# EAGLE board Reciever Circuit v3 (EAGLE 9.6.2)
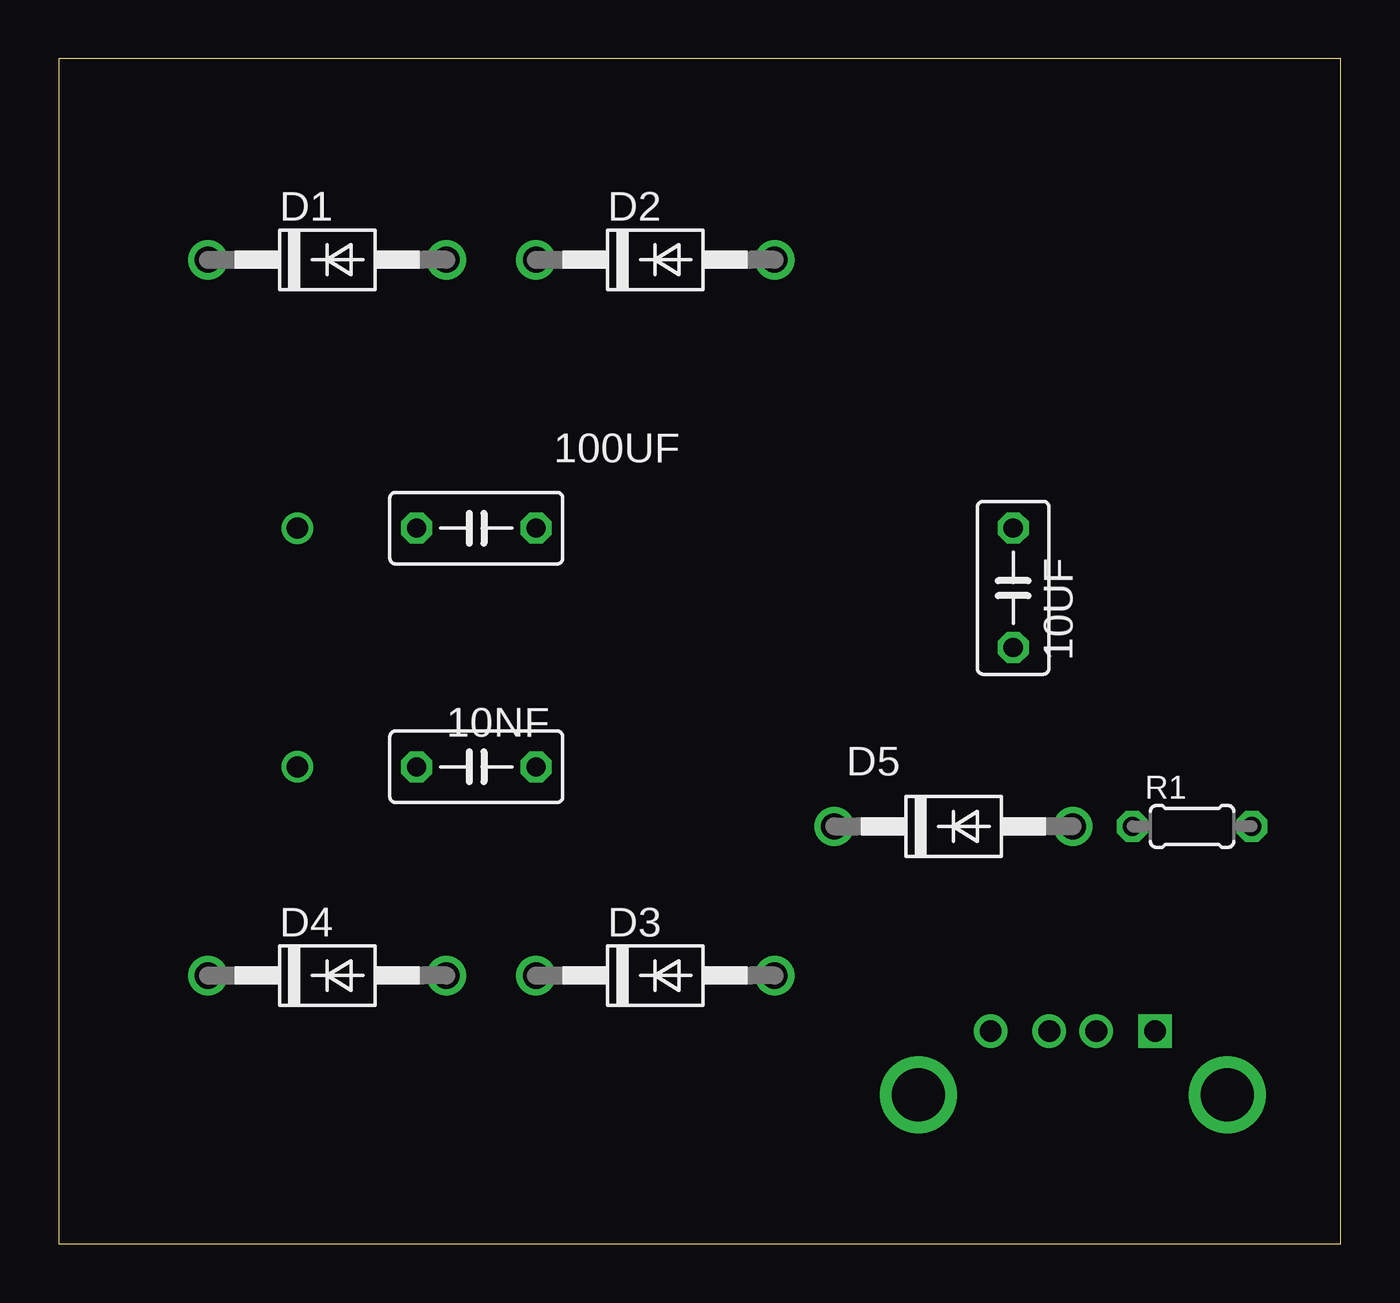
[diagram p0: board, top side]
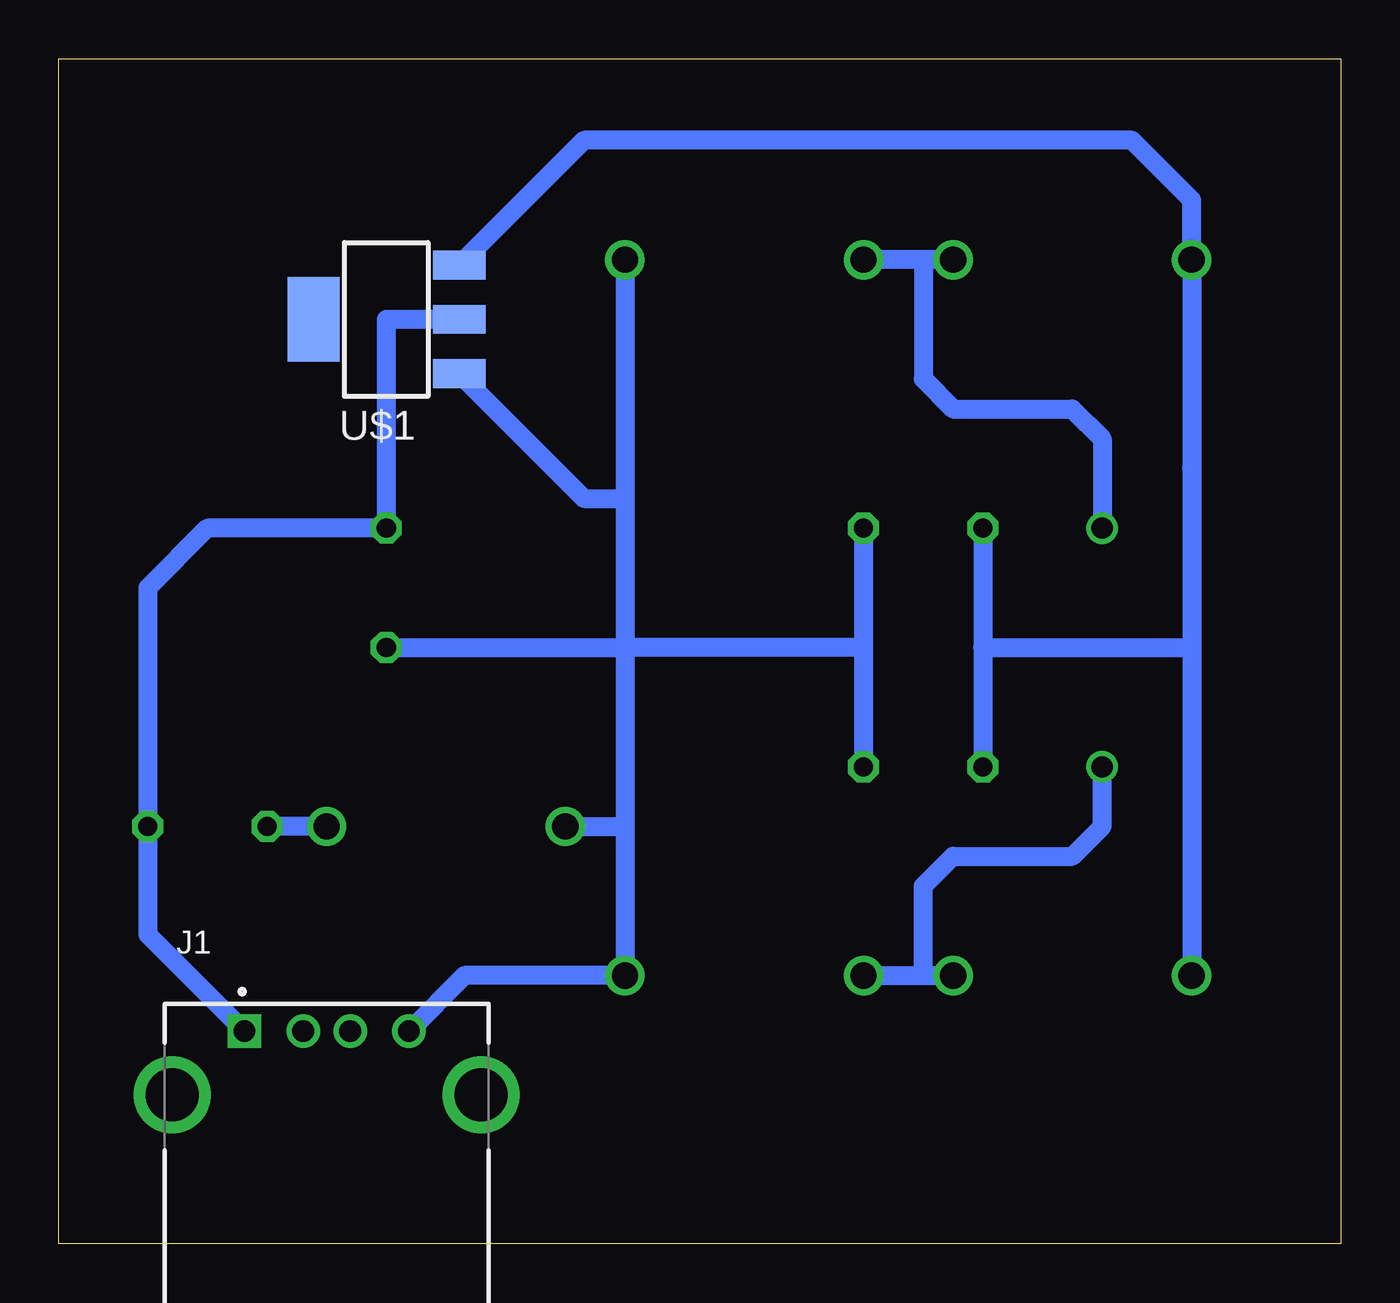
[diagram p1: board, bottom side, seen from below]

Size 54.59 x 50.47 mm. Coordinates in mm from the lower left corner, seen from the top.
Outline: 0,0 54.59,0 54.59,50.47 0,50.47 0,0
Copper layers (1*16): Top 0.035mm / dielectric 1.5mm / Bottom 0.035mm
Design rules "default": minimum track width 6mil, minimum drill 0.35mm, track to track 6mil, track to pad 6mil, pad to pad 6mil, via to via 6mil, smd to smd 6mil, copper to edge 40mil, drill to drill 6mil, minimum pad ring 10mil, minimum via ring 8mil, stop-mask expansion 4mil, vias tented up to drill 0mil, thermal gap 10mil

## Footprints (pad centres in the part's own frame; a part is rotated, then mirrored left to right if it is on the bottom)
C050-030X075 = drill 0.813 octagon: 1 -2.54,0; 2 2.54,0
DO41-10 = drill 1.118: A 5.08,0; C -5.08,0
GCT_USB1130-15-A_REVA = drill 0.92 square: 1 -3.5,2.71 | drill 0.92: 2 -1,2.71; 3 1,2.71; 4 3.5,2.71 | drill 2.26: S1 -6.57,0; S2 6.57,0
0204/5 = drill 0.813 octagon: 1 -2.54,0; 2 2.54,0
SOT223 = smd 1.219 x 2.235: 1 -2.311,-3.099; 2 0,-3.099; 3 2.311,-3.099 | smd 3.6 x 2.2: TAB 0,3.099

## Placement (x,y rotation side)
10NF  [C050-030X075]  17.78,20.32 0 top
10UF  [C050-030X075]  40.64,27.94 270 top
100UF  [C050-030X075]  17.78,30.48 0 top
D1  UF4003  [DO41-10]  11.43,41.91 0 top
D2  UF4003  [DO41-10]  25.4,41.91 0 top
D3  UF4003  [DO41-10]  25.4,11.43 0 top
D4  UF4003  [DO41-10]  11.43,11.43 0 top
D5  UF4003  [DO41-10]  38.1,17.78 0 top
J1  USB1130-15-A_REVA  [GCT_USB1130-15-A_REVA]  43.18,6.35 0 bottom
R1  [0204/5]  48.26,17.78 0 top
U$1  LD1117AS33  [SOT223]  40.64,39.37 90 bottom

## Library data of the parts
10NF 10UF 100UF = rcl; SPICEPREFIX: C
D1-D5 = diode
J1 = USB1130-15-A_REVA; AVAILABILITY: In Stock; DESCRIPTION: USB 2.0 Connector Full size Horizontal Plug, type A, 4 Pins, Through hole, Top mount, 6.99mm profile, High mating cycle, charging receptacle; MF: Global Connector Technology; MP: USB1130-15-A; PACKAGE: None; PRICE: None; PURCHASE-URL: https://pricing.snapeda.com/search/part/USB1130-15-A/?ref=eda
R1 = rcl; SPICEPREFIX: R
U$1 = LD1117AS33; AVAILABILITY: In Stock; DESCRIPTION: Linear Voltage Regulator IC Positive Fixed 1 Output 1A SOT-223; MF: STMicroelectronics; MP: LD1117AS33; PACKAGE: SOT-223 STMicroelectronics; PRICE: None; PURCHASE-URL: https://pricing.snapeda.com/search/part/LD1117AS33/?ref=eda

## Nets
COIL_TERMINATION1: D1.A D2.C
COIL_TERMINATION2: D3.C D4.A
GND: 10NF.2 10UF.2 100UF.2 D2.A D3.A D5.C J1.4 U$1.1
N$1: D5.A R1.1
N$4: 10NF.1 100UF.1 D1.C D4.C U$1.3
N$5: 10UF.1 J1.1 R1.2 U$1.2

## Tracks (layer width: path | path; a pad name or v marks a point on that pad's centre or on a via)
COIL_TERMINATION1  (via drill 0.9)
  Bottom 0.813: D1.A 17.78,41.91 | 17.78,41.91 D2.C | 17.78,41.91 17.78,36.83 16.51,35.56 11.43,35.56 10.16,34.29 v10.16,30.48
COIL_TERMINATION2  (via drill 0.9)
  Bottom 0.813: D3.C 17.78,11.43 | 17.78,11.43 D4.A | 17.78,11.43 17.78,15.24 16.51,16.51 11.43,16.51 10.16,17.78 v10.16,20.32
GND
  Bottom 0.813: D2.A 30.48,31.75 | 30.48,31.75 30.48,25.4 | 30.48,25.4 30.48,17.78 | 30.48,17.78 D3.A 37.31,11.43 J1.4 | 100UF.2 20.32,25.4 | 20.32,25.4 10NF.2 | 20.32,25.4 30.48,25.4 | 10UF.2 30.48,25.4 | U$1.1 32.23,31.75 30.48,31.75 | D5.C 30.48,17.78
N$1
  Bottom 0.813: D5.A R1.1
N$4
  Bottom 0.813: 6.35,25.4 6.35,33.02 D1.C 6.35,44.45 8.89,46.99 32.23,46.99 U$1.3 | 6.35,25.4 D4.C | 100UF.1 15.24,25.4 | 15.24,25.4 10NF.1 | 15.24,25.4 6.35,25.4
N$5
  Bottom 0.813: U$1.2 40.64,39.37 10UF.1 48.26,30.48 50.8,27.94 R1.2 50.8,13.18 J1.1